# Altium PCB PCB1.PcbDoc
Units mil, origin at the board's own origin, x right, y up, seen from the top; angles counter-clockwise.
Board outline 1845.03 x 2215.03 mil, 2 copper layers (Top Layer, Bottom Layer); 9 components, 8 nets, 22 pads, 0 vias.
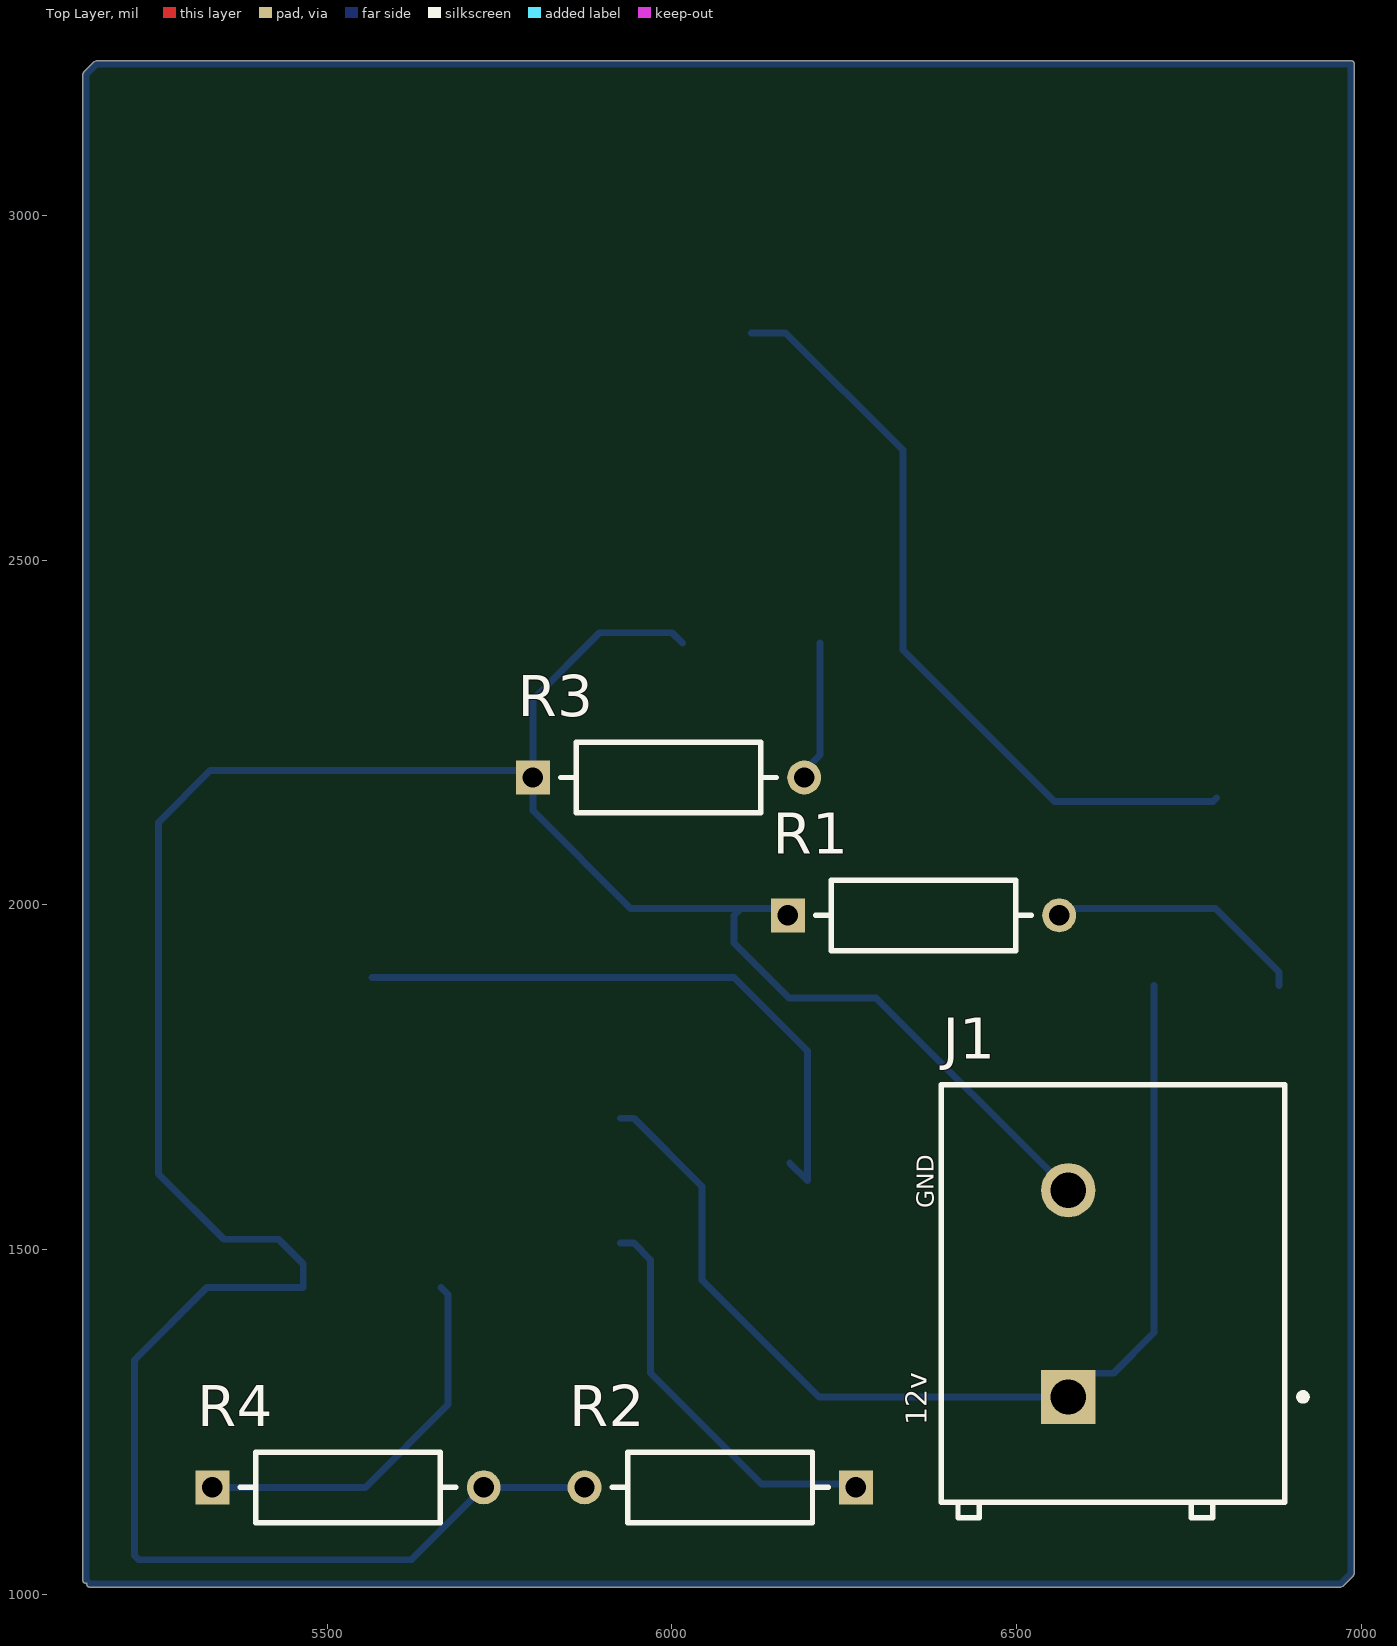
[diagram p0: Top Layer view]
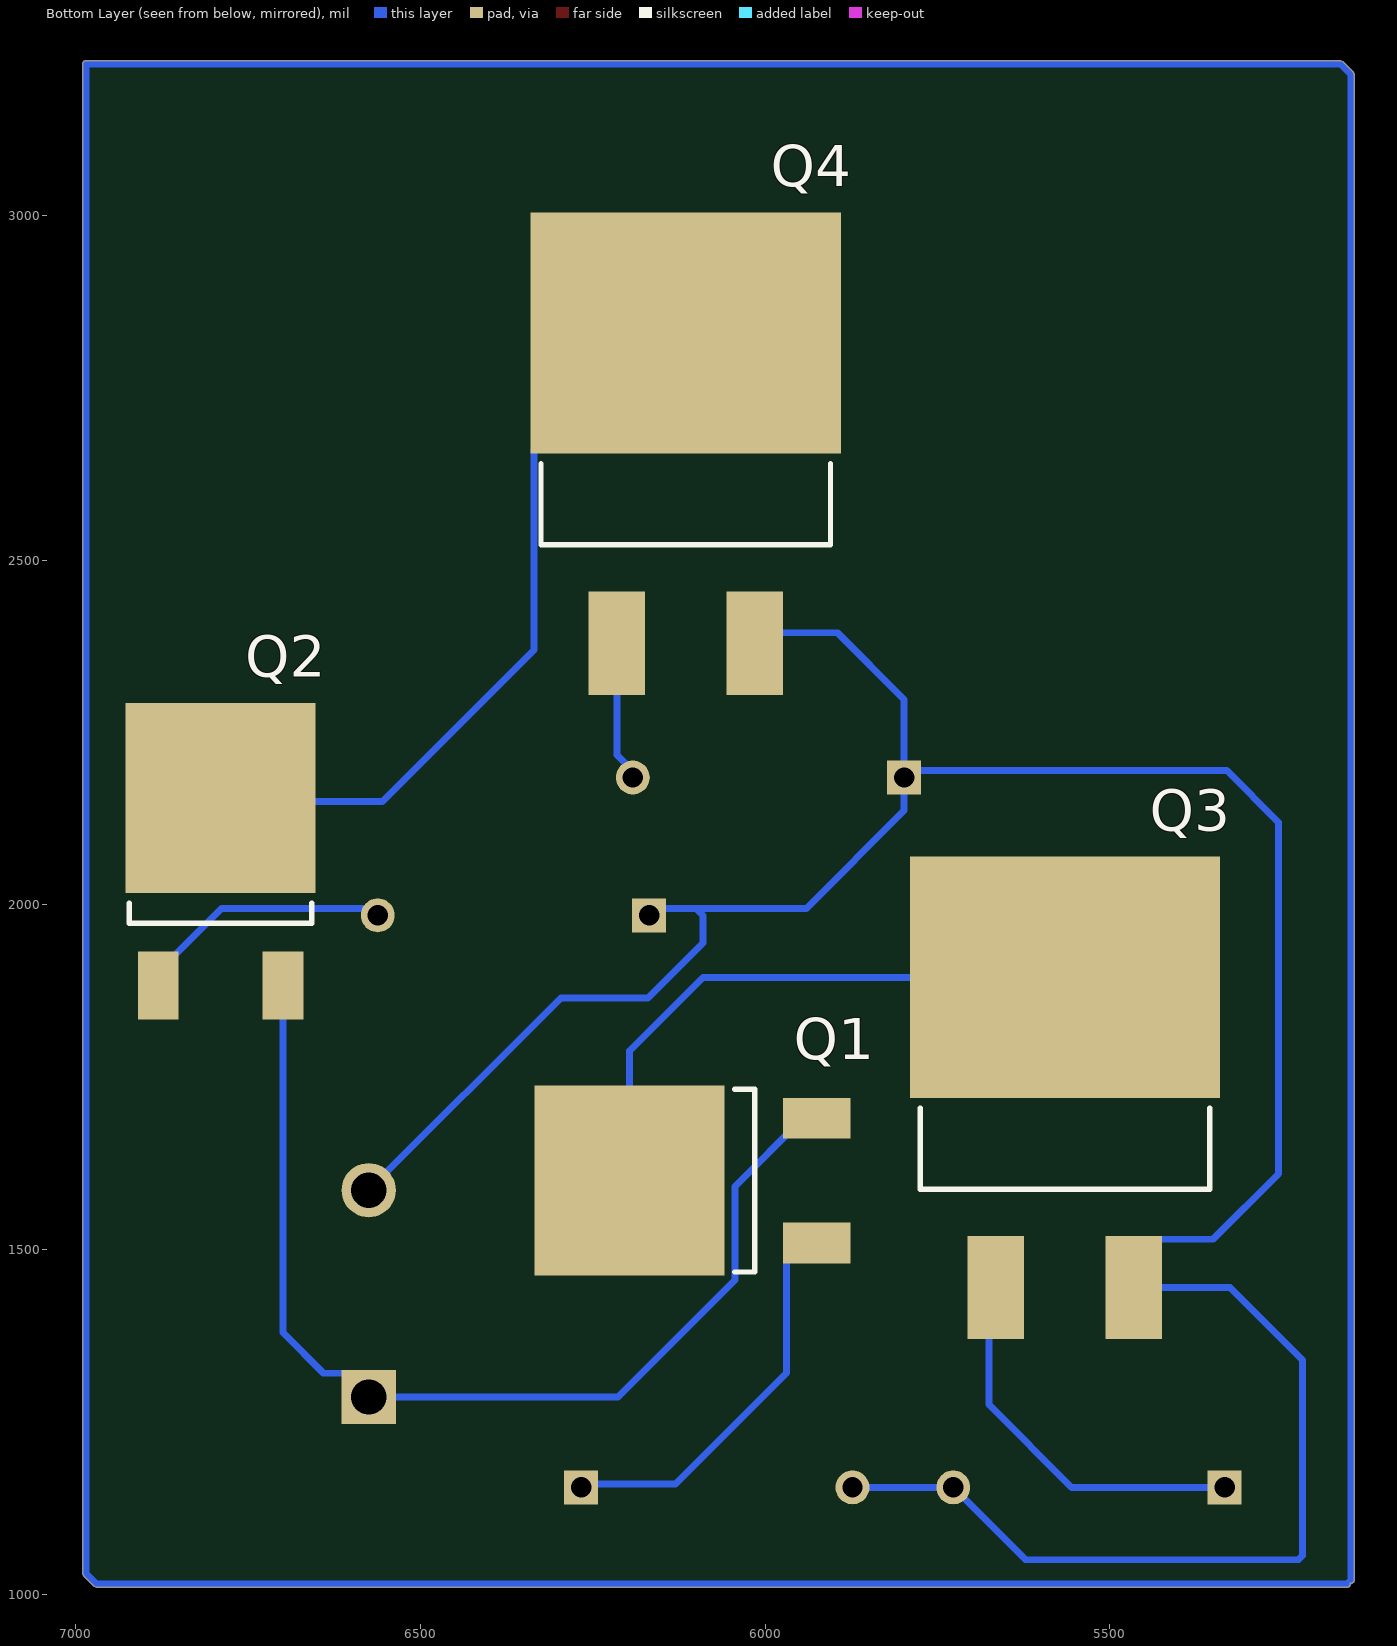
[diagram p1: Bottom Layer view, seen from below]
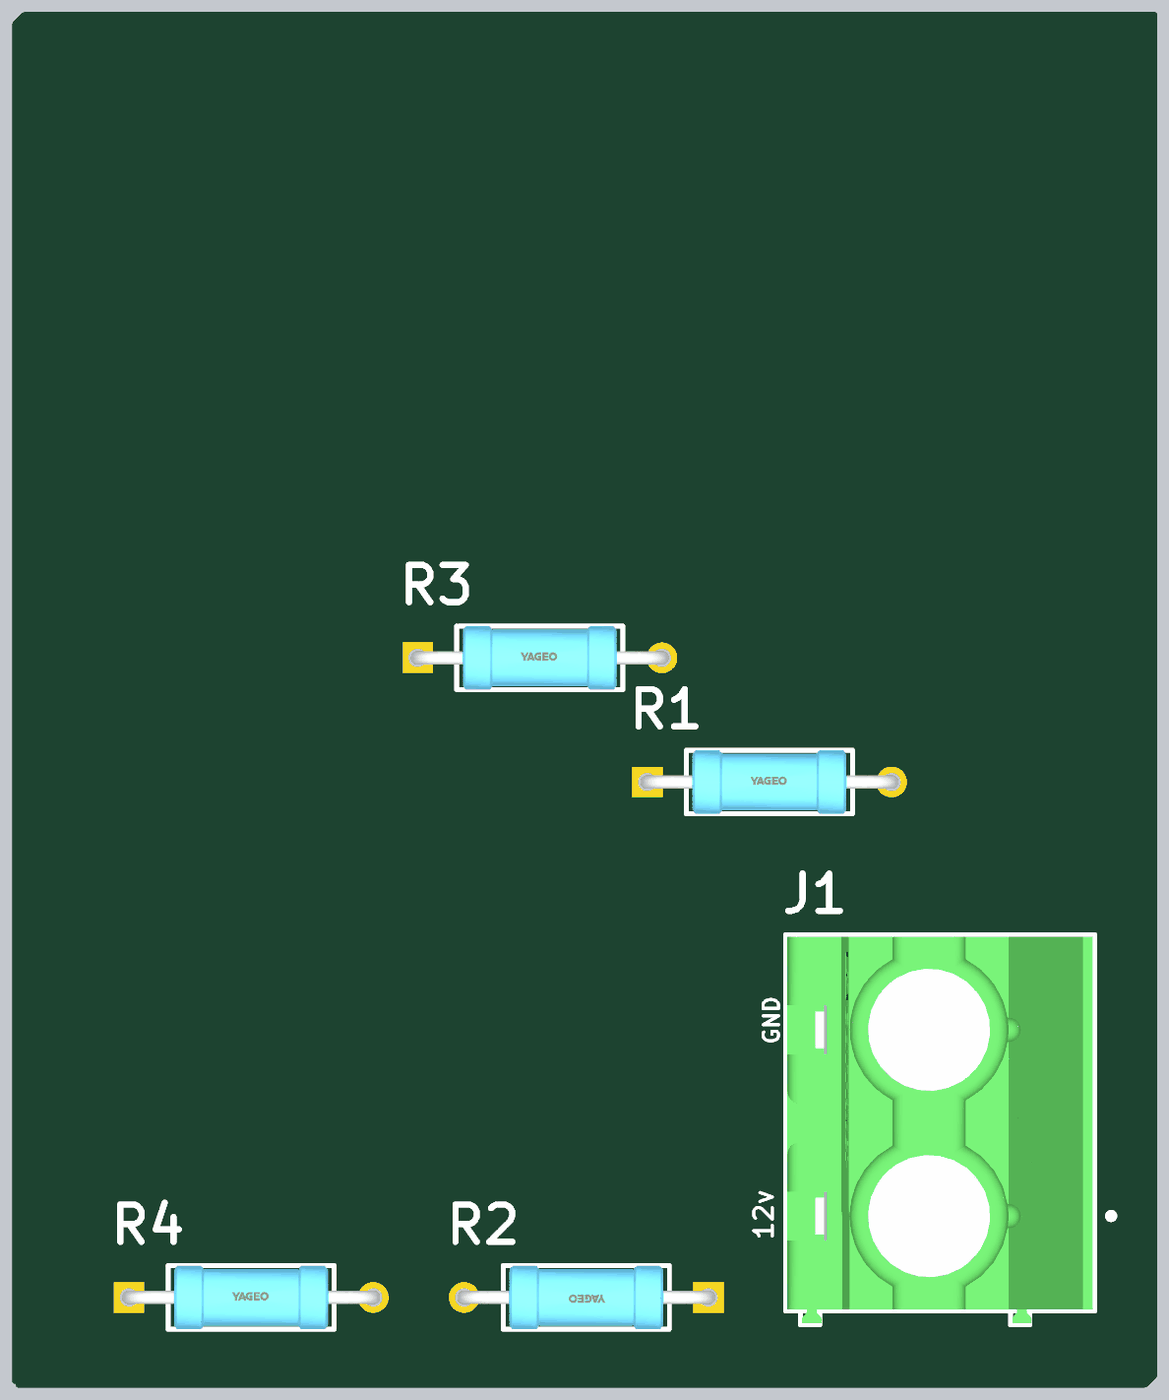
[diagram p2: 3D render of the assembled board from above, using the file's embedded part models]
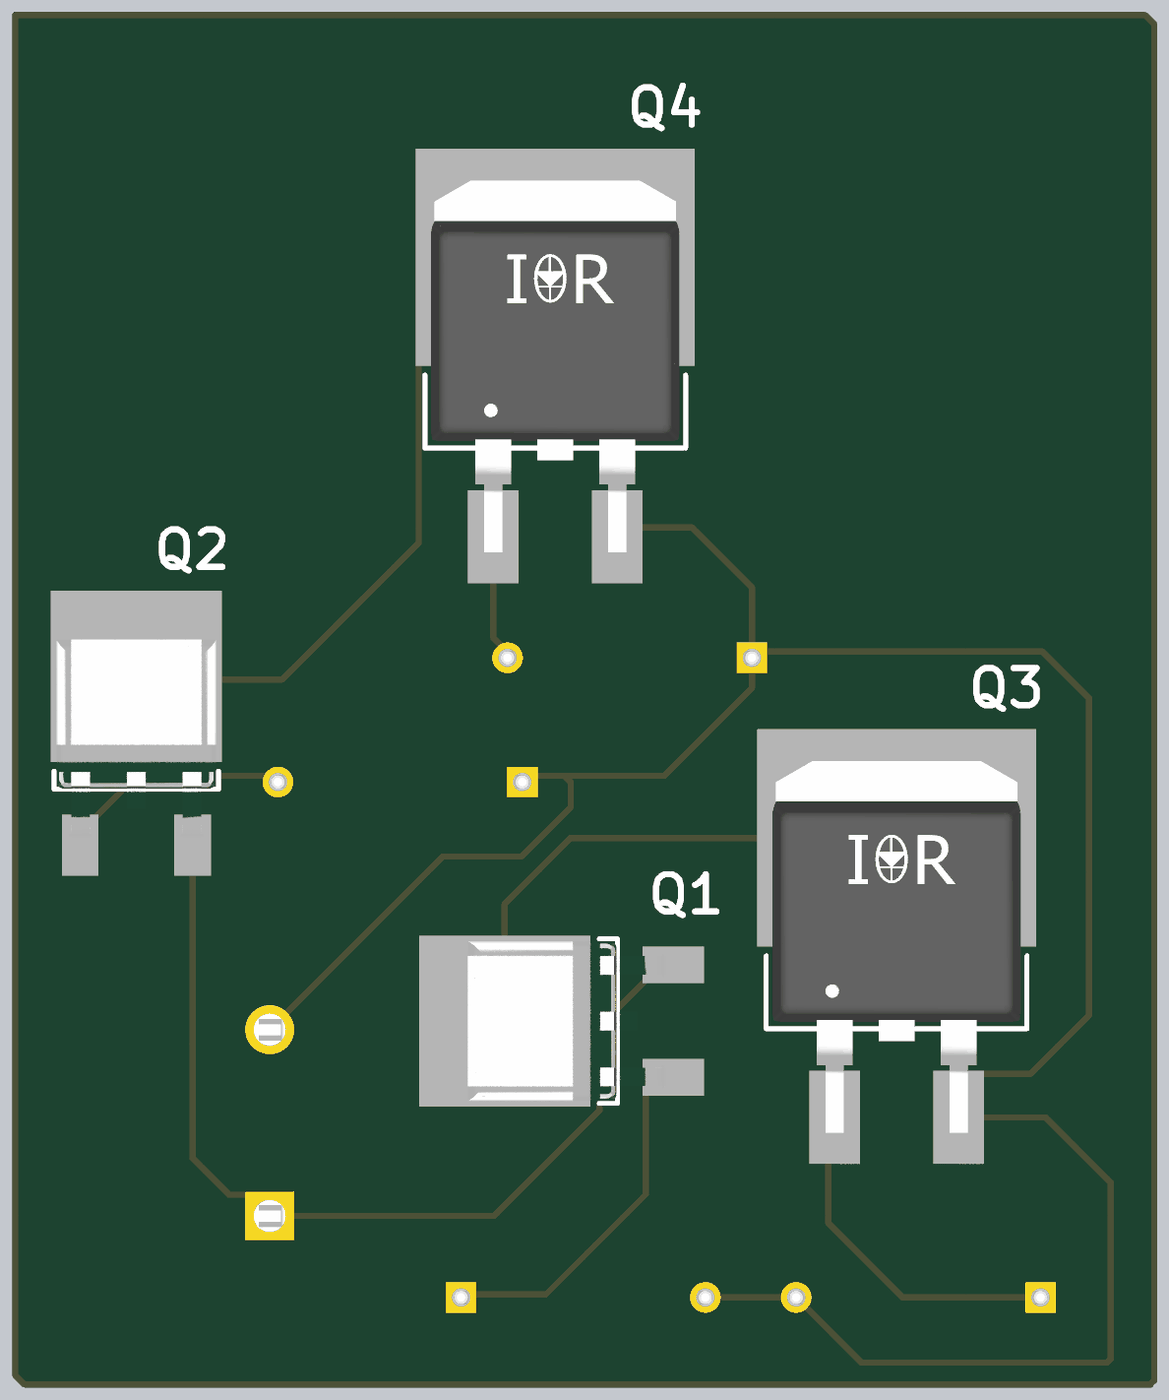
[diagram p3: 3D render of the assembled board from below, using the file's embedded part models]

## Layer stack, top to bottom
Top Solder: solder mask 0.4, Solder Resist, Dk 3.5
Top Layer: signal copper 1.4
Dielectric 1: dielectric 12.6, FR-4, Dk 4.8
Bottom Layer: signal copper 1.4
Bottom Solder: solder mask 0.4, Solder Resist, Dk 3.5

## Board outline
5144.98,1020.86 ccw(c5150,1020.86) 5150.93,1015.93 ccw(c5155.86,1015) 5155.86,1009.99 6970,1009.99 6973.55,1011.45 6988.55,1026.45 6990.02,1030 6990.02,3220 ccw(c6985,3220) 6985,3225.01 5165,3225.01 5161.45,3223.55 5146.45,3208.55 5144.98,3205

## Design rules (kind name [scope] priority, off if disabled: settings)
Clearance [All] p1: gap=10 ignorepadtopadclearanceinfootprint=FALSE
PolygonConnect [All] p1: connectstyle=Relief reliefconductorwidth=10 reliefentries=4 polygonreliefangle="90 Angle" airgapwidth=10
RoutingVias [All] p1: holewidth=28 width=50 viastyle="Through Hole" minholewidth=28 minwidth=50 maxholewidth=28 maxwidth=50
SolderMaskExpansion [All] p1: expansion=4 istentingtop=FALSE
SupplyNets "Schematic Supply Nets_1" [InNet('+12')] p1: voltage=0.000
SupplyNets "Schematic Supply Nets" [InNet('GND')] p2: voltage=0.000
Width [All] p1: maxlimit=10 minlimit=10 preferedwidth=10
30 further rules are at their usual default settings.

## Components (designator, comment, footprint, x,y, rotation, side; value= is the part's Value field where it differs from the comment)
J1 "1868076" FP-1868076-MFG 6640,1425 r90 top
Q1 "IRFR5410TRPBF" FP-PG-TO252-3-MFG 6105,1600 r90 bottom
Q2 "IRFR5410TRPBF" FP-PG-TO252-3-MFG 6790,2063.46 r180 bottom
Q3 "IRLZ44NSTRLPBF" FP-PG-TO263-3-MFG 5565,1720 r180 bottom
Q4 "IRLZ44NSTRLPBF" FP-PG-TO263-3-MFG 6115,2655 r180 bottom
R1 "MFR-25FBF52-1K18" FP-MFR-25-MFG 6365,1985 r0 top value=1.18kΩ
R2 "MFR-25FBF52-1K18" FP-MFR-25-MFG 6070,1155 r180 top value=1.18kΩ
R3 "MFR-25FBF52-1K18" FP-MFR-25-MFG 5995,2185 r0 top value=1.18kΩ
R4 "MFR-25FBF52-1K18" FP-MFR-25-MFG 5530,1155 r0 top value=1.18kΩ

## Footprints (in the part's own frame and the unit in brackets; to place one, negate y for a bottom-side part, rotate by r counter-clockwise, add the part's x,y. Pads: shape width x height; smd on the part's side, far side on the other; paste and mask are expansions set on the pad)
FP-1868076-MFG [mm]
  rect 2x2 hole 1.3 paste-2539.97 mask+0: 1(-3.525,1.65)
  round 2 hole 1.3 paste-2539.97 mask+0: 2(4.095,1.65)
  silkscreen extent -7.98,-7.13 7.98,6.32, body extent -8.08,-6.43 8.08,6.43, height 0.25
FP-MFR-25-MFG [mm]
  rect 1.25x1.25 hole 0.75 paste-2539.97 mask+0: 1(-5,0)
  round 1.25 hole 0.75 paste-2539.97 mask+0: 2(5,0)
  silkscreen extent -3.98,-1.3 3.98,1.3, body extent -5.72,-1.4 5.72,1.4, height 0.25
FP-PG-TO252-3-MFG [mm]
  rect 1.5x2.5 smd paste+0 mask+0: 1(-2.3,-4.575) 3(2.3,-4.575)
  rect 7x7 smd paste+0 mask+0: 4(0,2.325)
  silkscreen extent -3.36,-2.28 3.36,-1.55, body extent -3.27,-5.32 3.27,5.1, height 2.38
FP-PG-TO263-3-MFG [mm]
  rect 2.08x3.81 smd paste+0 mask+0: 1(-2.54,-6.985) 3(2.54,-6.985)
  rect 11.43x8.89 smd paste+0 mask+0: 4(0,4.445)
  silkscreen extent -5.34,-3.36 5.34,-0.38, body extent -5.08,-7.66 5.08,7.59, height 5.09

## Part data
J1: library part CMP-00298-00856132-1, "1868076 Conn Terminal Block 2 POS 7.62mm Solder ST Thru-Hole 32A Cardboard", Color=Green, Current=10A, Current Rating=32A, Flammability Rating="UL94 V-0", Voltage=300V, Voltage Rating=500V, Approvals="CSA, UL, cULus", Contact Material=Tin, Depth=12.5mm, Height=19.05mm, Housing Color=Green, Housing Material=Polyamide, Lead Free="Lead Free", Length=22.86mm, Mount="Through Hole", NexarPartId=856132, Number of Circuits=2, Number of Contacts=2, Number of Levels=1, Number of Pins=2, Number of Poles=2, Number of Positions=2, Number of Positions Per Level=2, Number of Rows=1, Orientation=Straight, Pitch=7.62mm, Radiation Hardening=No, RoHS=Compliant, Stripping Length=8mm, Termination=Solder, Weight=6.000006g, Width=26.6mm, Wire Gauge (Max)=30AWG, Wire Gauge (Min)=10AWG
Q1 Q2: library part CMP-32901-000090-1, "MOSFET P-CH 100V 13A DPAK", Continuous Drain Current=-13A, Drain To Source Breakdown Voltage=-100V, Drain To Source Resistance=0.205Ω, Gate To Source Voltage=20V, Input Capacitace At Vds="760pF @ -25V", Manufacturer=Infineon, Max Forward Diode Voltage=-1.6V, Max Junction Temp=+150°C, Package=PG-TO252-3, Power Dissipation=66W, Pulse Drain Current=-52A, Temperature="-55°C to +150°C", Temperature Range Low=-55°C, Automotive=No, Category=Trans, ComponentLink2Description=Datasheet, ComponentLink2URL=https://www.infineon.com/dgdl/irfr5410pbf.pdf?fileId=5546d462533600a4015356356f622107, Depletion Mode=False, Device Class L1="Discrete Semiconductors", Device Class L2=Transistors, Device Class L3=MOSFETs, Digikey Description="MOSFET P-CH 100V 13A DPAK", Drain To Source Voltage=-100V, Footprint Url=http://www.irf.com/package/hexfet/dpakfootprint.pdf, Gate Charge At Vgs="58nC @ -10V", Height=2.52mm, Lead Free=Yes, Manufacturer Part Number=IRFR5410TRPBF, Number Of Channels=1, Number Of P Channels=1, Octopart=https://octopart.com/irfr5410trpbf-infineon-65874169, Reverse Recovery Charge=650nC, Reverse Recovery Time=130ns, RoHS=TRUE, Rthja Max=50°C/W, Temperature Range High=+150°C, Threshold Vgs Max=-4V, Threshold Vgs Min=-2V, Turn Off Delay Time=45ns, Turn On Delay Time=15ns
Q3 Q4: library part CMP-32901-000495-1, "MOSFET N-CH 55V 47A D2PAK", Case/Package=D2PAK, Continuous Drain Current (ID)=47A, Drain To Source Breakdown Voltage=55V, Drain To Source Resistance=35mR, Gate to Source Voltage (Vgs)=16V, Input Capacitance=1.7nF, Max Operating Temperature=175°C, Max Power Dissipation=3.8W, Min Operating Temperature=-55°C, Power Dissipation=110W, Threshold Voltage=2V, Drain to Source Voltage (Vdss)=55V, Element Configuration=Single, Halogen Free="Halogen Free", Height=0.19inch, Lead Free="Contains Lead", Length=0.42inch, Max Dual Supply Voltage=55V, Mount="Surface Mount", Number of Pins=3, Packaging="Tape and Reel", Rds On Max=22mR, REACH SVHC="No SVHC", RoHS Compliant=Yes, Turn-Off Delay Time=26ns, Turn-On Delay Time=11ns, Width=0.38inch
R1 R2 R3 R4: library part CMP-03413-000001-1, "RES 1.18K OHM 1/4W 1% AXIAL", Manufacturer=Yageo, Package=MFR-25, Power Rating=0.25W, Resistance=1.18kΩ, Temperature="-55°C to +155°C", Temperature Coefficient=100ppm/°C, Temperature Range High=+155°C, Temperature Range Low=-55°C, Tolerance=1%, Voltage Rating=250V, Automotive=No, Category=Res, ComponentLink2Description=Datasheet, ComponentLink2URL=https://www.yageo.com/upload/media/product/products/datasheet/lr/Yageo_LR_MFR_1.pdf, Composition="Metal Film", Device Class L1="Passive Components", Device Class L2=Resistors, Device Class L3="Through-Hole Resistors", Digikey Description="RES 1.18K OHM 1/4W 1% AXIAL", Height=2.6mm, Ipc Land Pattern Name=RESAD1000W75L680D260, Lead Free=Yes, Manufacturer Part Number=MFR-25FBF52-1K18, Mouser Description="Metal Film Resistors 1.18K OHM 1/4W 1%", Octopart=https://octopart.com/mfr-25fbf52-1k18-yageo-56251681, RoHS=TRUE, Series=MFR

## Nets (pads, with @x,y where several pads share a name; then routed paths per layer and width w, separated by ;. In a path a pad name is that pad's centre, name@x,y a point inside that pad or via, vN(x,y) a via of type N, cw(c..) or ccw(c..) an arc to the next point about the centre after c; other vN are vias at no path point)
+12: J1.1 Q1.3 Q2.3 | length 1563.9
  Bottom Layer w10: Q1.3 5944.57,1690.55 6043.74,1591.38 6043.74,1455.99 6213.51,1286.22 J1.1 6609.41,1320.59 6640.59,1320.59 6699.45,1379.45 Q2.3
GND: J1.2 Q3.3 Q4.3 R1.1 R2.2 R3.1 R4.2 | length 4199.4
  Bottom Layer w10: R2.2 R4.2 5621.85,1050 5225.86,1050 5220,1055.86 5220,1340 5325,1445 Q3.3 5465,1479.06 5429.06,1515 5350,1515 5255,1610 5255,2120 5330,2195 5788.15,2195 R3.1 ; Q4.3 6000,2395 5895,2395 5798.15,2298.15 R3.1 ; R1.1@6168.15,1995 6100,1995 ; J1.2 6296.26,1865 6170,1865 6090,1945 6090,1985 6100,1995 ; R3.1 5798.15,2136.85 5940,1995 6100,1995
NetM1_1: Q2.4 Q4.4 | length 1128.6
  Bottom Layer w10: Q4.4 6165,2830 6335,2660 6335,2370 6555,2150 6785,2150 Q2.4
NetQ1_1: Q1.1 R2.1 | length 584.9
  Bottom Layer w10: Q1.1 5944.57,1509.45 5969.09,1484.92 5969.09,1320.91 6130,1160 6261.85,1160 R2.1
NetQ1_4: Q1.4 Q3.4 | length 900.4
  Bottom Layer w10: Q3.4 6090,1895 6196.54,1788.46 Q1.4 Q1.4@6170.86,1625.68
NetQ2_1: Q2.1 R1.2 | length 376.5
  Bottom Layer w10: R1.2@6561.85,1995 6788.58,1995 6880.55,1903.03 Q2.1
NetQ3_1: Q3.1 R4.1 | length 565.7
  Bottom Layer w10: R4.1 5555,1155 5675,1275 5675,1435 Q3.1
NetQ4_1: Q4.1 R3.2 | length 204.6
  Bottom Layer w10: R3.2 6191.85,2194.71 6215,2217.86 Q4.1
copper on no net: | length 8059
  Bottom Layer w10: 5150,1020.86 5150,3205 5165,3220 6985,3220 6985,1030 6970,1015 5155.86,1015 5150,1020.86

## Silkscreen, mask and mechanical layers (free items; w line width, h text height)
Top Overlay:
  text "GND" at 6380,1560 h25 r90
  text "12v" at 6370,1245 h30 r90